# Altium PCB Receive_Station_PCB.PcbDoc
Units mm, origin at the board's own origin, x right, y up, seen from the top; angles counter-clockwise.
Board outline 85.55 x 77.77 mm, 2 copper layers (Top Layer, Bottom Layer); 36 components, 17 nets, 119 pads, 0 vias.
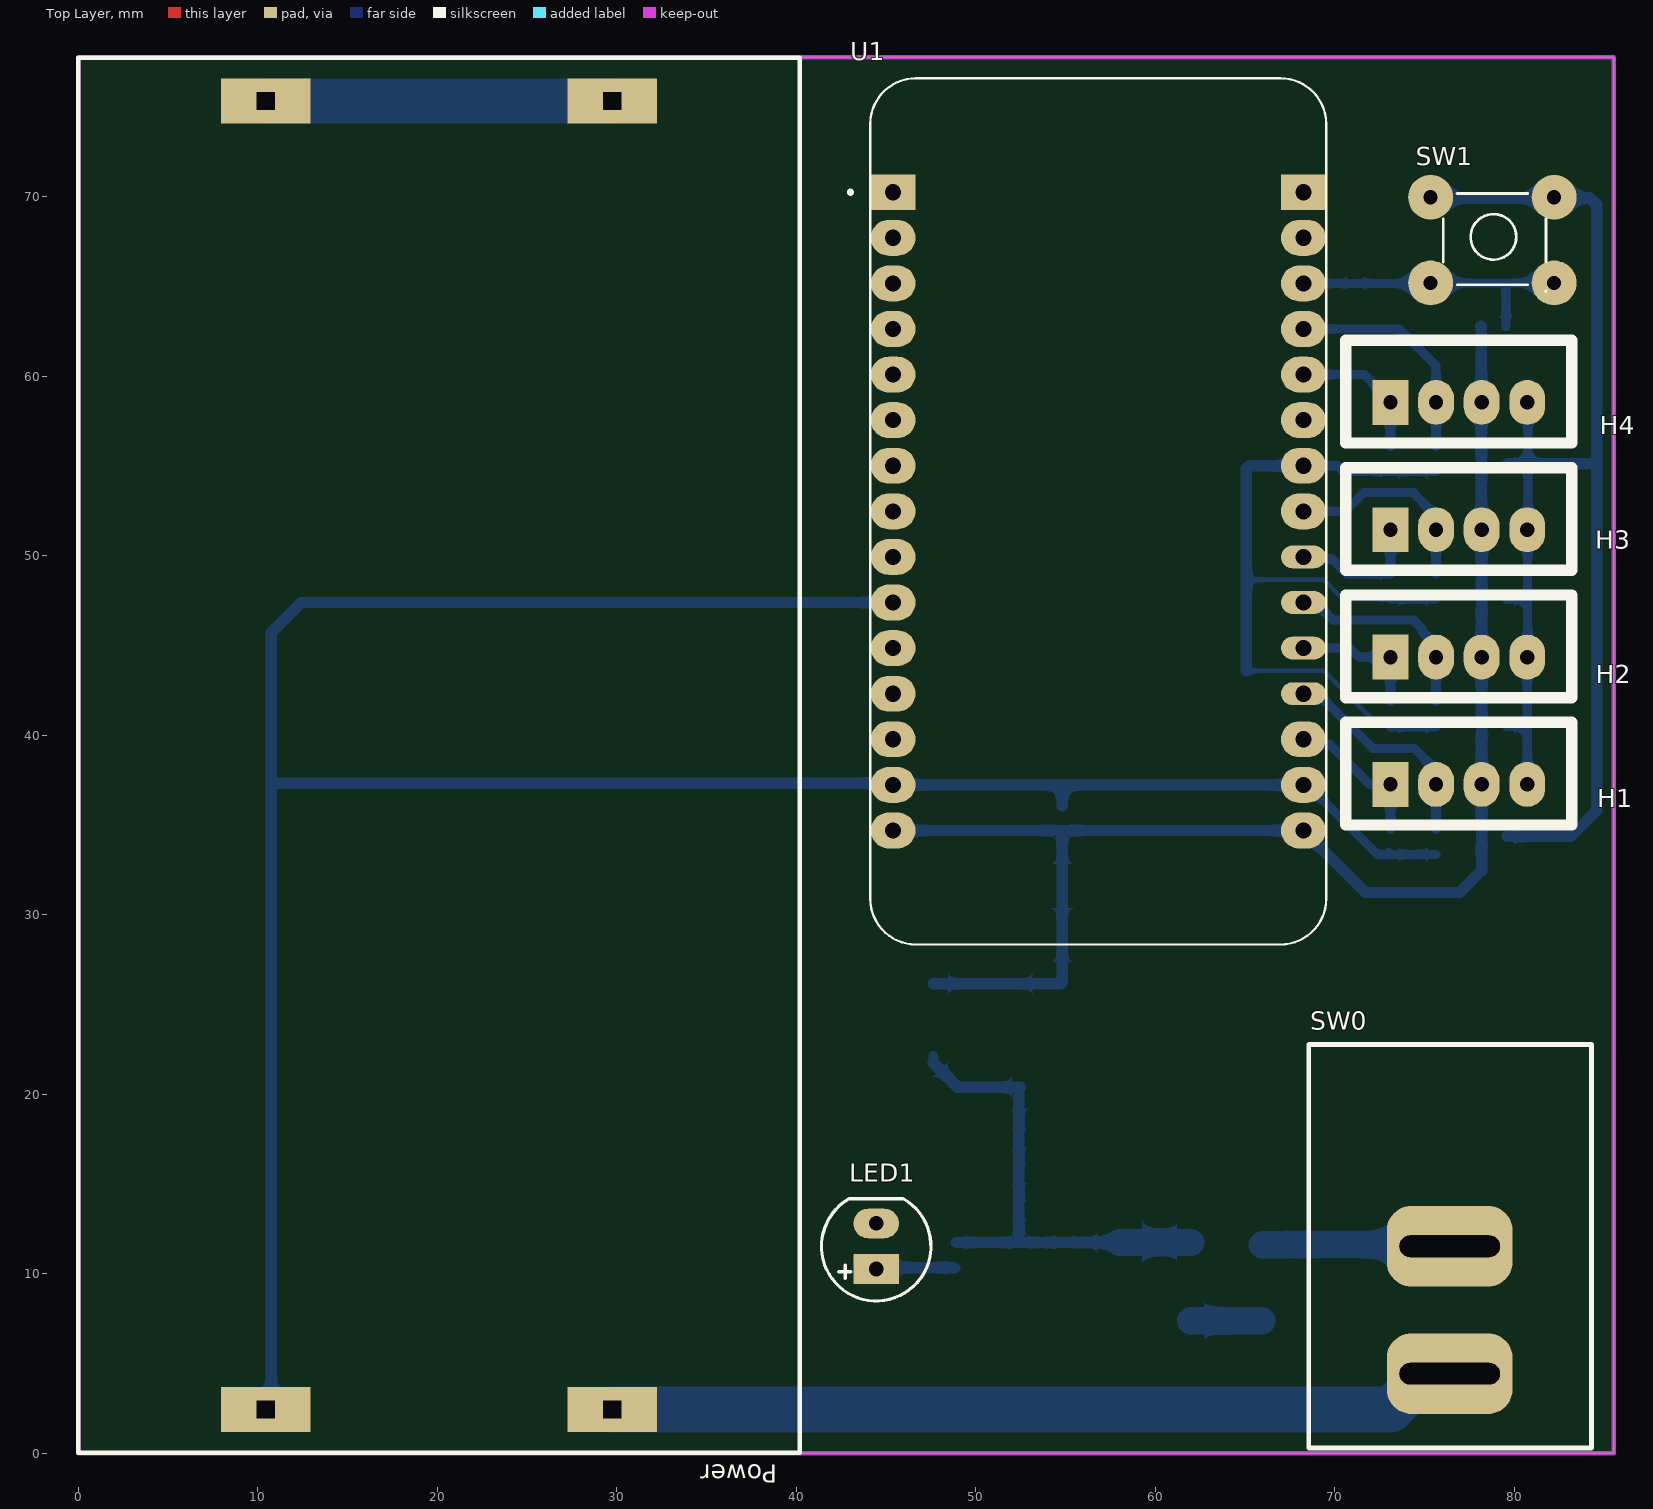
[diagram p0: Top Layer view]
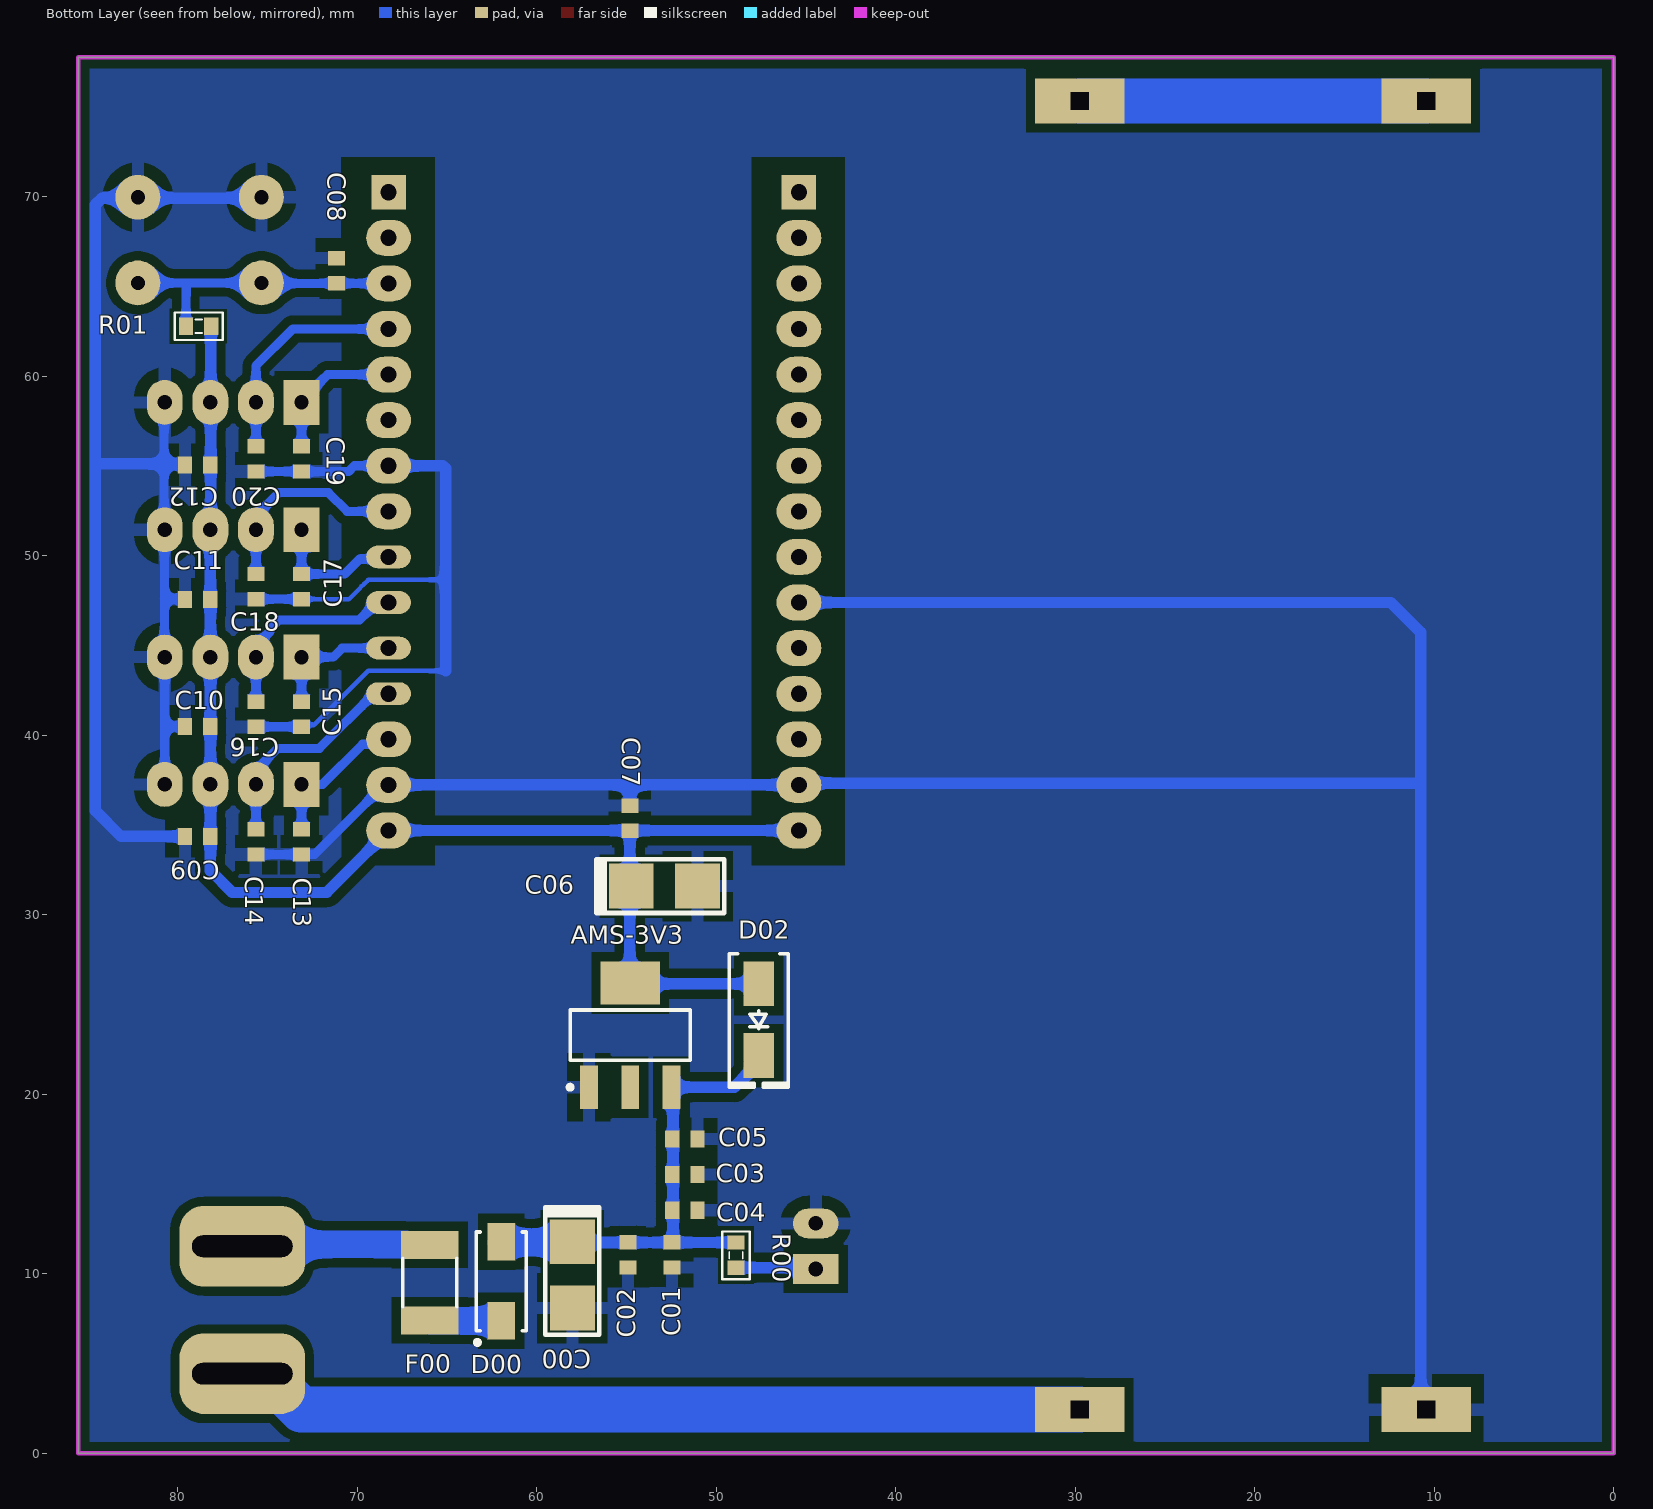
[diagram p1: Bottom Layer view, seen from below]
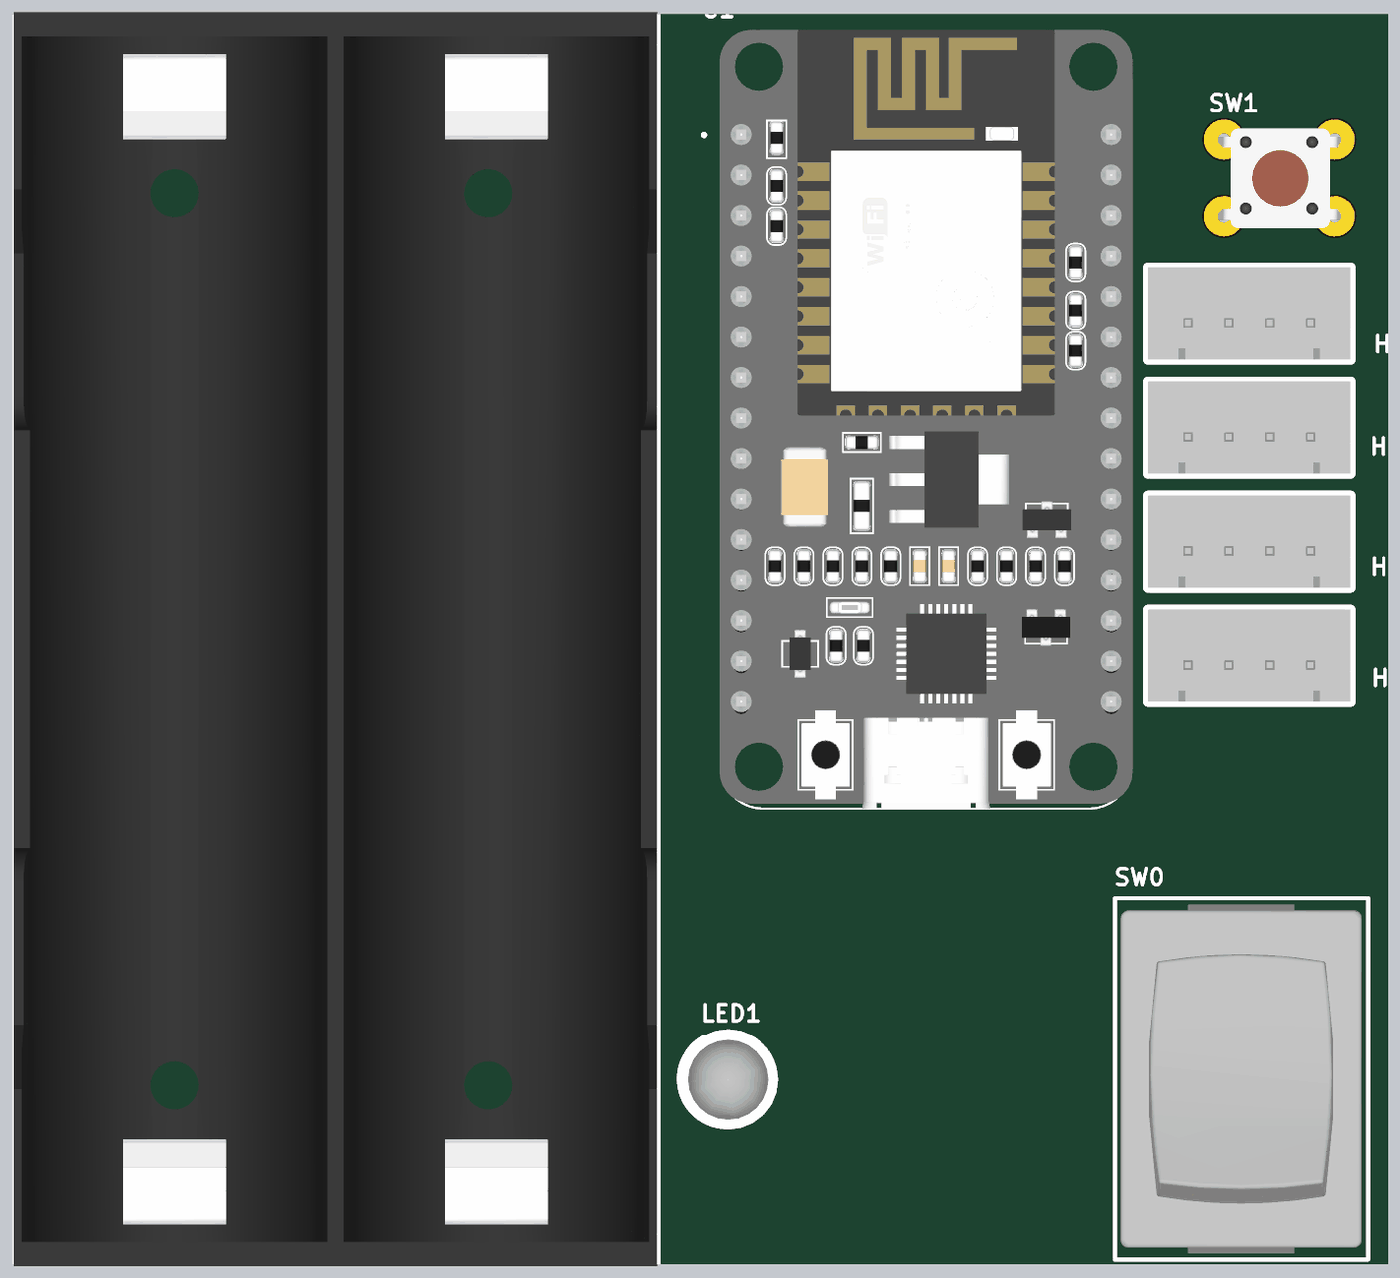
[diagram p2: 3D render of the assembled board from above, using the file's embedded part models]

## Layer stack, top to bottom
Top Solder: solder mask 0.0102, Solder Resist, Dk 3.5
Top Layer: signal copper 0.0356
Dielectric 1: dielectric 0.32, FR-4, Dk 4.8
Bottom Layer: signal copper 0.0356
Bottom Solder: solder mask 0.0102, Solder Resist, Dk 3.5

## Board outline
0,0 85.547,0 85.547,77.775 0,77.775 0,53.975

## Design rules (kind name [scope] priority, off if disabled: settings)
Clearance [All] p1: gap=0.508 ignorepadtopadclearanceinfootprint=FALSE
PolygonConnect [All] p1: connectstyle=Relief reliefconductorwidth=0.7 reliefentries=4 polygonreliefangle="90 Angle" airgapwidth=0.7
RoutingVias [All] p1: holewidth=0.711 width=1.27 viastyle="Through Hole" minholewidth=0.711 minwidth=1.27 maxholewidth=3 maxwidth=3
SolderMaskExpansion [All] p1: expansion=0.102 istentingtop=FALSE
Width [All] p1: maxlimit=3 minlimit=0.254 preferedwidth=0.254 toplayer_maxwidth=0.254 minimp=50.000000 maximp=50.000000 favimp=50.000000
30 further rules are at their usual default settings.

## Components (designator, comment, footprint, x,y, rotation, side; value= is the part's Value field where it differs from the comment)
AMS-3V3 "AMS1117-3.3V" SOT223 54.788,23.292 r180 bottom value="AMS1117-3.3V SOT223"
C00 "100uF" "tu tantalum smd3528" 58.014,9.931 r270 bottom
C01 "Cap Non-Pol SMD" CAP-SM-0603 52.451,11.049 r90 bottom value=0.1uF
C02 "Cap Non-Pol SMD" CAP-SM-0603 54.915,11.049 r90 bottom value=0.1uF
C03 "Cap Non-Pol SMD" CAP-SM-0603 51.74,15.519 r0 bottom value=0.1uF
C04 "Cap Non-Pol SMD" CAP-SM-0603 51.74,13.538 r0 bottom value=0.1uF
C05 "Cap Non-Pol SMD" CAP-SM-0603 51.74,17.501 r0 bottom value=0.1uF
C06 "100uF" "tu tantalum smd3528" 52.883,31.598 r180 bottom
C07 "Cap Non-Pol SMD" CAP-SM-0603 54.813,35.382 r270 bottom value=1uF
C08 "Cap Non-Pol SMD" CAP-SM-0603 71.145,65.888 r270 bottom value=0.1uF
C09 "Cap Non-Pol SMD" CAP-SM-0603 78.892,34.366 r180 bottom value=0.1uF
C10 "Cap Non-Pol SMD" CAP-SM-0603 78.892,40.488 r180 bottom value=0.1uF
C11 "Cap Non-Pol SMD" CAP-SM-0603 78.892,47.574 r180 bottom value=0.1uF
C12 "Cap Non-Pol SMD" CAP-SM-0603 78.892,55.067 r180 bottom value=0.1uF
C13 "Cap Non-Pol SMD" CAP-SM-0603 73.101,34.061 r90 bottom value=0.1uF
C14 "Cap Non-Pol SMD" CAP-SM-0603 75.641,34.061 r90 bottom value=0.1uF
C15 "Cap Non-Pol SMD" CAP-SM-0603 73.101,41.173 r90 bottom value=0.1uF
C16 "Cap Non-Pol SMD" CAP-SM-0603 75.641,41.173 r90 bottom value=0.1uF
C17 "Cap Non-Pol SMD" CAP-SM-0603 73.101,48.285 r90 bottom value=0.1uF
C18 "Cap Non-Pol SMD" CAP-SM-0603 75.641,48.285 r90 bottom value=0.1uF
C19 "Cap Non-Pol SMD" CAP-SM-0603 73.101,55.397 r90 bottom value=0.1uF
C20 "Cap Non-Pol SMD" CAP-SM-0603 75.641,55.397 r90 bottom value=0.1uF
D00 "D Schottky" SS34 61.976,9.576 r90 bottom
D02 "100v" "DIODE SMA" 47.625,24.155 r270 bottom
F00 "Fuse" "FUSE SMD" 65.964,9.5 r270 bottom
H1 "Sig_1" XH2.54M-4 73.101,37.262 r0 top
H2 "Sig_2" XH2.54M-4 73.101,44.357 r0 top
H3 "Sig_3" XH2.54M-4 73.101,51.452 r0 top
H4 "Sig_4" XH2.54M-4 73.101,58.547 r0 top
LED1 "LED SMD" LED-5MM-WHITE 44.45,11.532 r90 top
Power "Power" 18650x2 20.091,38.887 r180 top
R00 "RESISTOR SMD" RES-SM-0603 48.895,11.724 r270 bottom value=1K
R01 "RESISTOR SMD" RES-SM-0603 79.527,62.789 r180 bottom value=10K
SW0 "SWITCH 10A-2PIN" SW_2ARS_TH 76.429,4.482 r180 top
SW1 "Nut Nhan 4 Chan Cam 6x6" "Nut Nhan 4 Chan Cam 6x6" 75.667,70.18 r0 top
U1 "ESP8266" SEEED_113990105 56.82,52.476 r0 top

## Footprints (in the part's own frame and the unit in brackets; to place one, negate y for a bottom-side part, rotate by r counter-clockwise, add the part's x,y. Pads: shape width x height; smd on the part's side, far side on the other; paste and mask are expansions set on the pad)
18650x2 [mm]
  rect 5x2.5 hole 1 square: 1(-9.65,36.45) 2(-9.65,-36.45) 3(9.65,-36.45) 4(9.65,36.45)
  round 0.508 on Top Overlay: 7(-5.131,36.347)
  silkscreen extent -20.1,-38.85 20.1,38.85, body extent -20,-39 20,39, height 21.65
CAP-SM-0603 [mm] "SMD Ceramic Capacitor Size 0603"
  rect 0.8x0.95 smd: 1(-0.7,0) 2(0.7,0)
  body extent -0.85,-0.45 0.85,0.45, height 0.6
"DIODE SMA" [mm] "SMA"
  rect 2.5x1.7 smd: 1(-2,0) 2(2,0)
  silkscreen extent -3.68,-1.65 3.75,1.65, body extent -2.6,-1.37 2.6,1.37, height 2.4
"FUSE SMD" [mm] "SMD FUSE"
  rect 1.55x3.21 smd: 1(-2.1,0) 2(2.1,0)
  silkscreen extent -1.35,-1.5 1.35,1.51, body extent -2.37,-1.71 2.36,1.71, height 0.75
LED-5MM-WHITE [mil] "LED 2 PIN, 5 ly , Only colour, pin to pin 110mil"
  rect 65x100 hole 32: 1(-50,0)
  oval 65x100 hole 32: 2(50,0)
  silkscreen extent -120,-120 104,120, body extent -124,-125 121,120, height 340
"Nut Nhan 4 Chan Cam 6x6" [mil] "SW button 4pin, 250 x250 mil"
  round 98.43 hole 31: 1(-13,-8) 1(258,-8) 2(-13,-196) 2(258,-196)
  silkscreen extent 15,-215 240,0, body extent -31,-225 281,19, height 276
RES-SM-0603 [mm]
  rect 0.8x0.95 smd: 1(-0.014,0) 2(1.386,0)
  silkscreen extent -0.64,-0.76 2.03,0.76, body extent -0.11,-0.4 1.49,0.4, height 0.3
SEEED_113990105 [mm]
  rect 2.5x2 / inner round 1.93 / far side rect 1.93x1.93 hole 0.9: J1_1(-11.43,17.78) J2_1(11.43,17.78)
  oval 2.5x2 hole 0.9: J1_2(-11.43,15.24) J1_3(-11.43,12.7) J1_4(-11.43,10.16) J1_5(-11.43,7.62) J1_6(-11.43,5.08) J1_7(-11.43,2.54) J1_8(-11.43,0) J1_9(-11.43,-2.54) J1_10(-11.43,-5.08) J1_11(-11.43,-7.62) J1_12(-11.43,-10.16) J1_13(-11.43,-12.7) J1_14(-11.43,-15.24) J1_15(-11.43,-17.78) J2_2(11.43,15.24) J2_3(11.43,12.7) J2_4(11.43,10.16) J2_5(11.43,7.62) J2_6(11.43,5.08) J2_7(11.43,2.54) J2_8(11.43,0) J2_13(11.43,-12.7) J2_14(11.43,-15.24) J2_15(11.43,-17.78)
  oval 2.5x1.27 hole 0.9: J2_9(11.43,-2.54) J2_10(11.43,-5.08) J2_11(11.43,-7.62) J2_12(11.43,-10.16)
  round 3.2 on Mech13: ""(-10.16,-21.59) ""(-10.16,21.59) ""(10.16,-21.59) ""(10.16,21.59)
  silkscreen extent -13.91,-24.13 12.7,24.13, body extent -12.84,-24.16 12.85,24.33, height 6.84
SOT223 [mm]
  rect 1x2.4 smd: 1(-2.3,-2.9) 2(0,-2.9) 3(2.3,-2.9)
  rect 3.3x2.4 smd: 4(0,2.9)
  silkscreen extent -3.48,-3.02 3.35,1.4, body extent -3.25,-3.56 3.25,3.4, height 1.68
SS34 [mm] "DO-214-AC/SMA Molded Diode, Body 5.3x2.6mm, IPC Medium Density"
  rect 2.1x1.55 smd: 1(-2.2,0) 2(2.2,0)
  silkscreen extent -3.52,-1.4 2.75,1.45, body extent -2.75,-1.42 2.75,1.38, height 2.3
SW_2ARS_TH [mm] "CASE: TH"
  rrect60% 7x4.5 hole 1.2 slot 5.6 at 0 deg mask+0.076: 1(0.025,0.051) 2(0.025,-7.049)
  silkscreen extent -7.87,-18.29 7.87,4.19, body extent -7.47,-17.9 7.53,3.8, height 17.81
"tu tantalum smd3528" [mm]
  rect 2.5x2.5 smd: 1(-1.85,0) 2(1.85,0)
  silkscreen extent -3.78,-1.5 3.33,1.5, body extent -1.85,-1.46 1.85,1.47, height 2.03
XH2.54M-4 [mm]
  rect 2x2.5 hole 0.8: 1(0,0)
  oval 2x2.5 hole 0.8: 2(2.54,0) 3(5.08,0) 4(7.62,0)
  silkscreen extent -2.48,-2.26 10.1,3.46, body extent -2.48,-2.26 10.1,3.48, height 6.91

## Part data
AMS-3V3: library part "AMS1117 SMD", "Dán", Chung_Loai=Dán, Don_Vi=Con, Ma_Hang=MH000596
C00 C06: library part "Tu tantalum 100uF 10V SMD6032", "Dán", Chung_Loai=Dán, Don_Vi=Con, Ma_Hang=MH007594, So_Chan=2, Ten_Linh_Kien="Tụ tantalum 107A-100uF 10V SMD6032"
C01 C02 C03 C04 C05 C07 C08 C09 C10 C11 C12 C13 C14 C15 C16 C17 C18 C19 C20: "Capacitor"
D00: "Schottky Diode", Code_JEDEC=DO-214-AA, LatestRevisionDate=17-Jul-2002, LatestRevisionNote="Re-released for DXP Platform.", PackageDescription="DO-214-AA/SMB; 2 C-Bend Leads; Body 5.3 x 3.6 mm, inc. leads (LxW)", PackageReference=SMB, Published=8-Jun-2000, Publisher="Altium Limited"
D02: library part "Diode 1N4007", "Cắm", Chung_Loai=Cắm, Don_Vi=Con, Ma_Hang=MH001063, Ten_Linh_Kien="Diode 1N4007 1A (DIP)"
H1 H2 H3 H4: library part "Header 4P 2.54 Duc Thang", "Cắm", Chung_Loai=Cắm, Don_Vi=Con, Ma_Hang=MH001285, Ten_Linh_Kien="Header 4P XH2.54-4P Đực Thẳng"
LED1: "LED"
Power: library part P?
R00 R01: "Resistor"
SW0: library part SW1_RS-471005264153-TH, "Rocker Switch SPST 16A (AC), 10A (DC) 250V Panel Mount, Snap-In", Alternate Part Number-1=NA, Case/Package=TH, Manufacturer="Würth Elektronik", Manufacturer Part Number=471005264153, Supplier Part Number-1=471005264153, Supplier-1="Würth Elektronik"
SW1: "Nut Nhan 4 Chan 6x6mm", Ma_Hang=MH004584, Ten="Nút Nhấn 4 Chân 6x6x5MM DIP"
U1: library part 113990105, "- ESP8266 Transceiver; 802.11 b/g (Wi-Fi, WiFi, WLAN) 2.4GHz Evaluation Board", Package=None, Availability="In Stock", Check_prices=https://www.snapeda.com/parts/113990105/Seeed+Technology+Co.%252C+Ltd/view-part/?ref=eda, MF="Seeed Technology Co., Ltd", MP=113990105, Price=None, Purchase-URL=https://pricing.snapeda.com/search/part/113990105/?ref=eda, SnapEDA_Link=https://www.snapeda.com/parts/113990105/Seeed+Technology+Co.%252C+Ltd/view-part/?ref=snap

## Nets (pads, with @x,y where several pads share a name; then routed paths per layer and width w, separated by ;. In a path a pad name is that pad's centre, name@x,y a point inside that pad or via, vN(x,y) a via of type N, cw(c..) or ccw(c..) an arc to the next point about the centre after c; other vN are vias at no path point)
3V3: AMS-3V3.4 C06.1 C07.2 C09.2 C10.2 C11.2 C12.2 D02.1 H1.3 H2.3 H3.3 H4.3 R01.2 U1.J1_15 U1.J2_15 | length 80.8
  Bottom Layer w0.635: U1.J1_15 54.813,34.696 U1.J2_15 71.704,31.242 76.962,31.242 78.181,32.461 78.181,34.366 H1.3 H2.3 H3.3 78.161,51.472 H4.3@78.161,58.527 ; D02.1 54.705,26.155 AMS-3V3.4@54.788,26.238 ; AMS-3V3.4 AMS-3V3.4@54.788,26.238 ; C07.2@54.813,34.606 54.813,26.264 AMS-3V3.4@54.788,26.238 ; H4.3@78.13,58.496 H4.3@78.161,58.527 ; R01.2 78.161,62.769 H4.3@78.161,58.527 ; H4.3 H4.3@78.161,58.527
D2: C08.2 R01.1 SW1.2 U1.J2_3 | length 16.4
  Bottom Layer w0.508: U1.J2_3 75.311,65.176 75.336,65.202 79.629,65.202 ; R01.1 79.542,64.502 79.527,64.516 79.527,65.1 79.629,65.202 ; SW1.2@82.22,65.202 79.629,65.202
D3: C20.2 H4.2 U1.J2_4 | length 12.7
  Bottom Layer w0.508: U1.J2_4 73.584,62.636 75.641,60.579 C20.2
D4: C19.2 H4.1 U1.J2_5 | length 8.2
  Bottom Layer w0.508: U1.J2_5 71.645,60.096 H4.1@73.101,58.641 ; C19.2 H4.1 H4.1@73.101,58.641 ; H4.1@73.101,58.797 H4.1@73.101,58.641 ; H4.1@73.148,58.594 H4.1@73.101,58.641
D5: C18.2 H3.2 U1.J2_8 | length 11.6
  Bottom Layer w0.508: U1.J2_8 70.561,52.476 71.603,53.518 74.371,53.518 75.641,52.248 75.641,52.106 H3.2 C18.2
D6: C17.2 H3.1 U1.J2_9 | length 7.7
  Bottom Layer w0.508: U1.J2_9 68.363,49.823 69.862,49.823 70.699,48.985 C17.2 H3.1
D7: C16.2 H2.2 U1.J2_10 | length 11.6
  Bottom Layer w0.508: U1.J2_10 68.904,47.396 69.877,46.423 74.362,46.423 74.863,45.922 74.863,45.789 75.641,45.011 H2.2 C16.2
D8: C15.2 H2.1 U1.J2_11 | length 7.5
  Bottom Layer w0.508: U1.J2_11 70.841,44.856 71.34,44.357 H2.1 C15.2
D9: C14.2 H1.2 U1.J2_12 | length 12.4
  Bottom Layer w0.508: U1.J2_12 69.063,42.316 72.105,39.274 74.417,39.274 75.641,38.049 75.641,37.916 H1.2 C14.2
D10: C13.2 H1.1 U1.J2_13 | length 8.4
  Bottom Layer w0.508: U1.J2_13 68.529,39.498 69.697,39.498 71.933,37.262 H1.1 C13.2
GND: AMS-3V3.1 C00.2 C01.1 C02.1 C03.1 C04.1 C05.1 C06.2 C07.1 C08.1 C09.1 C10.1 C11.1 C12.1 C13.1 C14.1 C15.1 C16.1 C17.1 C18.1 C19.1 C20.1 H1.4 H2.4 H3.4 H4.4 LED1.2 Power.4 SW1.1 U1.J1_10 U1.J1_14 U1.J2_7 U1.J2_14 | length 268.2
  Bottom Layer w0.254: 65.075,43.586 69.391,43.586 72.394,40.583 72.991,40.583 C15.1 ; 65.075,48.666 69.378,48.666 69.452,48.592 69.637,48.407 69.648,48.396 cw(c68.865,47.396) 69.865,48.179 70.459,47.585 C17.1
  Bottom Layer w0.508: U1.J2_14 68.5,37.236 70.544,35.192 72.375,33.361 C13.1 ; U1.J2_7 70.155,55.016 70.485,54.686 72.88,54.686 72.891,54.697 C19.1 C20.1 ; C13.1@72.996,33.467 C13.1 ; C15.1 C16.1 ; C17.1 C18.1 ; C14.1 C13.1 ; C10.1 80.721,40.488 ; C11.1 79.618,47.6 80.747,47.6 ; H1.4 80.721,40.488 ; H3.4 80.747,51.427 80.747,47.6 ; H4.4 80.754,58.514 80.754,55.118 80.754,52.307 H3.4@81.077,51.984 ; 80.721,40.488 H2.4 80.747,44.382 80.747,47.6
  Bottom Layer w0.635: Power.4 10.746,2.742 10.746,45.73 12.412,47.396 U1.J1_10 ; 11.05,37.338 45.288,37.338 U1.J1_14 54.813,37.236 ; C07.1 54.813,37.236 ; 65.075,43.586 65.075,48.666 65.075,54.868 65.224,55.016 U1.J2_7 ; U1.J2_14 54.813,37.236 ; SW1.1@75.336,69.977 75.387,69.926 84.223,69.926 84.595,69.554 84.595,55.143 ; C09.1 83.16,34.366 84.595,35.801 84.595,55.143 ; C12.1 79.643,55.118 80.754,55.118 84.569,55.118 84.595,55.143
NetD00_1: D00.1 F00.2 | length 4
  Bottom Layer w0.508: F00.2@65.94,7.376 F00.2
  Bottom Layer w1.524: D00.1 F00.2@65.94,7.376
NetF00_1: F00.1 SW0.2 | length 10.5
  Bottom Layer w1.524: F00.1 65.977,11.613 67.279,11.613 67.3,11.633 76.302,11.633 SW0.2
NetLED1_1: LED1.1 R00.2 | length 4.5
  Bottom Layer w0.508: LED1.1 45.034,10.262 45.085,10.211 LED1.1@45.212,10.338 ; R00.2@48.819,10.262 R00.2
  Bottom Layer w0.635: LED1.1@45.212,10.338 R00.2@48.743,10.338
NetPower_1: Power.1 SW0.1 | length 47.5
  Bottom Layer w2.54: Power.1 73.116,2.437 75.11,4.432 SW0.1
NetPower_2: Power.2 Power.3 | length 19.3
  Bottom Layer w2.5: Power.3 Power.2
Vin: AMS-3V3.3 C00.1 C01.2 C02.2 C03.2 C04.2 C05.2 D00.2 D02.2 R00.1 | length 27.8
  Bottom Layer w0.508: D02.2@47.625,21.755 D02.2 ; C01.2@52.4,11.789 C01.2@52.451,11.738 ; AMS-3V3.3@52.4,20.304 AMS-3V3.3 ; D00.2@61.814,11.938 D00.2
  Bottom Layer w0.635: D02.2@47.625,21.755 48.989,20.392 AMS-3V3.3 ; R00.1 52.451,11.738 C00.1@58.014,11.738 ; C01.2@52.4,11.789 52.4,13.538 AMS-3V3.3@52.4,20.304
  Bottom Layer w1.524: C00.1@58.014,11.738 D00.2@61.976,11.738
pads on no net: AMS-3V3.2 Power.7 U1. U1.J1_1 U1.J1_2 U1.J1_3 U1.J1_4 U1.J1_5 U1.J1_6 U1.J1_7 U1.J1_8 U1.J1_9 U1.J1_11 U1.J1_12 U1.J1_13 U1.J2_1 U1.J2_2 U1.J2_6

## Polygon pours and split planes (outlines as drawn)
GND on Bottom Layer "NONET_L-01_P-001" (solid, pour order 0): 0,77.775 85.547,77.775 85.547,0 0,0

## Keep-outs
Keep-Out Layer:
  the board outline again, w0.254

## Other copper
Bottom Layer:
  pour cut-out: 65.684,72.212 70.891,72.212 70.891,32.766 65.684,32.766
  pour cut-out: 42.824,72.212 48.031,72.212 48.031,32.766 42.824,32.766